# EAGLE board Environment-ArduinoNano33-V10-Bottom-V10 (EAGLE 9.5.2)
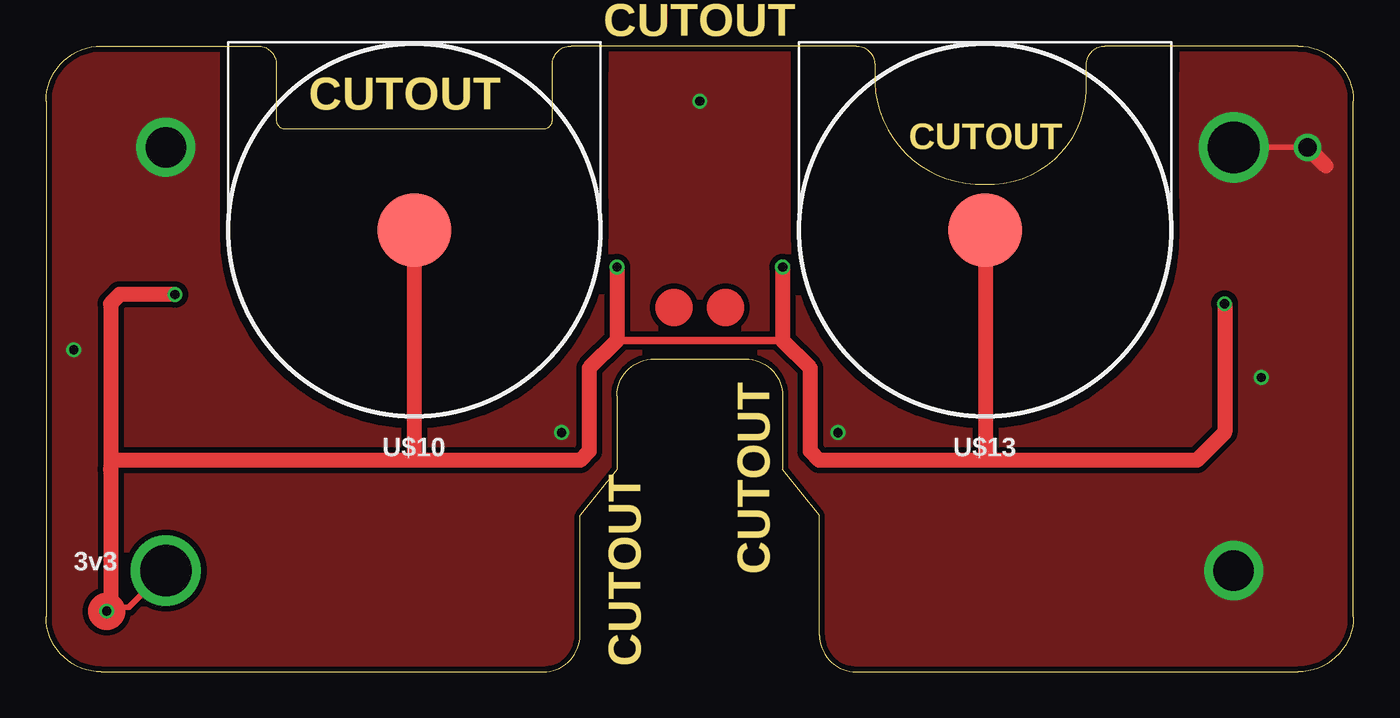
[diagram p0: board, top side]
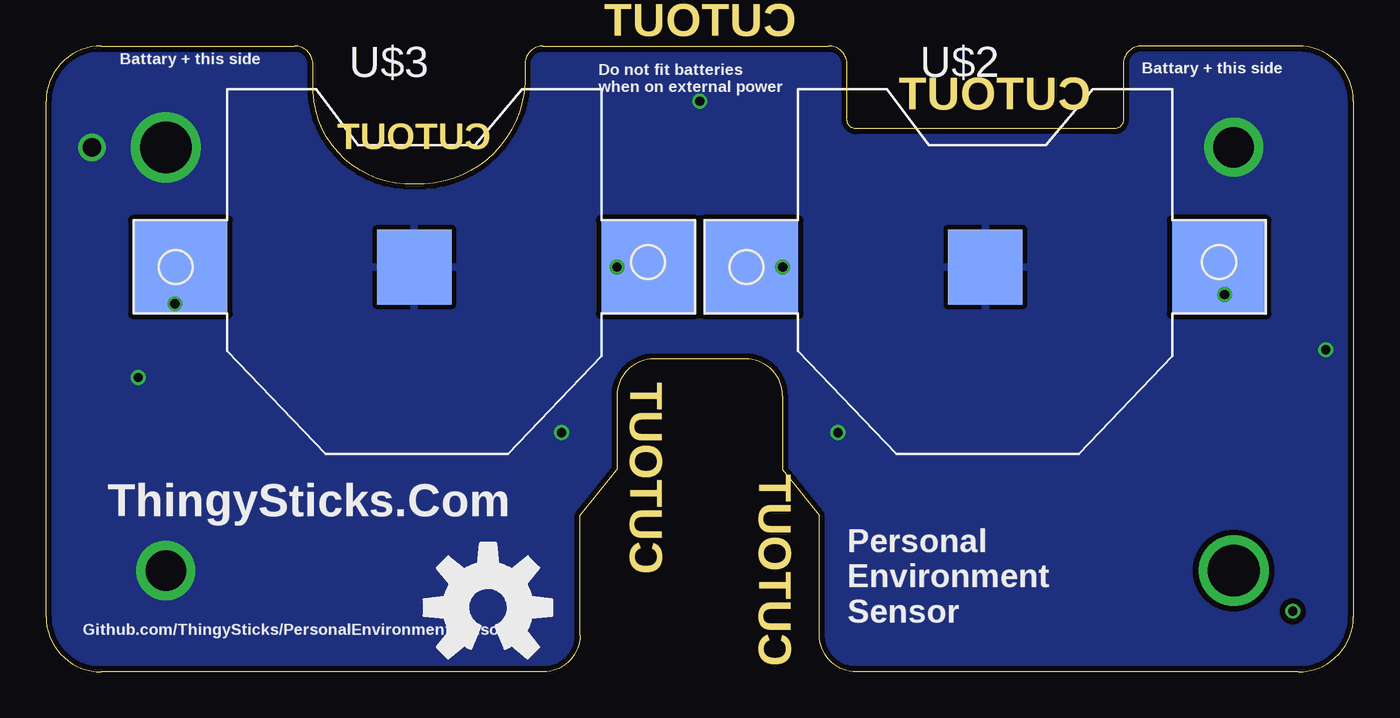
[diagram p1: board, bottom side, seen from below]

Size 71 x 34 mm. Coordinates in mm from the lower left corner, seen from the top.
Outline: 3,0 27,0 arc90 29,2 29,8.5 31,11 31,15 arc-90 33,17 38,17 arc-90 40,15 40,11 42,8.5 42,2 arc90 44,0 68,0 arc90 71,3 71,31 arc90 68,34 57.5,34 arc90 56.5,33 56.5,32 arc-95 51,26.5 arc-90 45,32 45,33 arc90 44,34 28.5,34 arc90 27.5,33 27.5,30 arc-90 27,29.5 13,29.5 arc-90 12.5,30 12.5,33 arc90 11.5,34 3,34 arc90 0,31 0,3 arc90 3,0
Copper layers (1*16): Top 0.035mm / dielectric 1.5mm / Bottom 0.035mm
Design rules "dirt_cheap_dirty_boards.v1.1": minimum track width 6mil, minimum drill 12mil, track to track 6mil, track to pad 6mil, pad to pad 6mil, via to via 6mil, smd to smd 0mil, copper to edge 10mil, drill to drill 10mil, minimum pad ring 10mil, minimum via ring 6mil, stop-mask expansion 2mil, vias tented up to drill 25mil, thermal gap 10mil
bKeepout: area 41,14 to 61,34; area 10,14 to 30,34
tRestrict: area 10,14 to 30,34; area 41,14 to 61,34

## Footprints (pad centres in the part's own frame; a part is rotated, then mirrored left to right if it is on the bottom)
CR2032-SMD = smd 5.08 x 5.08: +$1 -12.7,0; +$2 12.7,0 | smd 4.064 x 4.064: - 0,0
CR2032-SMD-POSITIVE-TERMINAL = smd 4 x 4 bottom: + 0,0

## Placement (x,y rotation side)
LOGO3  OSHW-LOGOL  [OSHW-LOGO-L]  47,3.5 0 bottom
U$2  [CR2032-SMD]  20,22 0 bottom
U$3  [CR2032-SMD]  51,22 0 bottom
U$10  CR2032-SPLIT-PCB-POSITIVE  [CR2032-SMD-POSITIVE-TERMINAL]  20,24 0 bottom
U$13  CR2032-SPLIT-PCB-POSITIVE  [CR2032-SMD-POSITIVE-TERMINAL]  51,24 0 bottom

## Library data of the parts
LOGO3 = SparkFun-Aesthetics
U$2 U$3 U$10 U$13 = ThingySticks

## Nets
3.3V: U$2.+$1 U$2.+$2 U$3.+$1 U$3.+$2 U$10.+ U$13.+
GND: U$2.- U$3.-

## Tracks (layer width: path | path; a pad name or v marks a point on that pad's centre or on a via)
3.3V  (via drill 0.5, 2.8)
  Top 0.305: 3.5,3.5 4.5,3.5 v6.5,5.5
  Top 0.406: 51,11.5 50.5,11.5 | 40,18 31,18 | 4,11.5 3.5,11
  Top 0.813: U$13.+ 51,11.5 | 20,11.5 29,11.5 29.5,12 29.5,16.5 31,18 v31,22 | 20,11.5 4,11.5 | v3.3,3.3 3.5,3.5 3.5,11 3.5,20 4,20.5 v7,20.5 | U$10.+ 20,11.5 | v40,22 40,18 41.5,16.5 41.5,12 42,11.5 50.5,11.5 62.5,11.5 64,13 v64,20
  Bottom 0.305: U$2.+$2 7.3,20.8 v7,20.5 | U$2.+$1 32.7,20.8 v31,22 | U$3.+$2 38.3,20.7 v40,22 | U$3.+$1 63.7,20.3 v64,20
GND  (via drill 0.5, 1, 2.2, 2.8)
  Top 0.305: v64.5,28.5 v68.5,28.5
  Top 0.813: 69.5,27.5 v68.5,28.5
  other vias: 1.5,17.5 35.5,31 66,16 64.5,5.5 6.5,28.5 28,13 43,13
  pour Bottom (isolate 0.305, rank 4): 0,34 71,34 71,0 0,0
  pour Top (isolate 0.305, rank 4): 0,34 71,34 71,0 0,0
(copper drawn outside any net)
  shapes: Top circle x3

## Text on the board
Dimension: CUTOUT | CUTOUT | CUTOUT | CUTOUT | CUTOUT
tNames: 3v3
bNames: Battary + this side | Battary + this side | Do not fit batteries / when on external power | ThingySticks.Com | Personal / Environment / Sensor | Github.com/ThingySticks/PersonalEnvironmentSensor
tValues: Coin Cell Base Option
Reference: Bottom PCB
tDocu: NFC Pads